# EAGLE board Lost-Tile-v1.0.0_v2 (EAGLE 9.7.0)
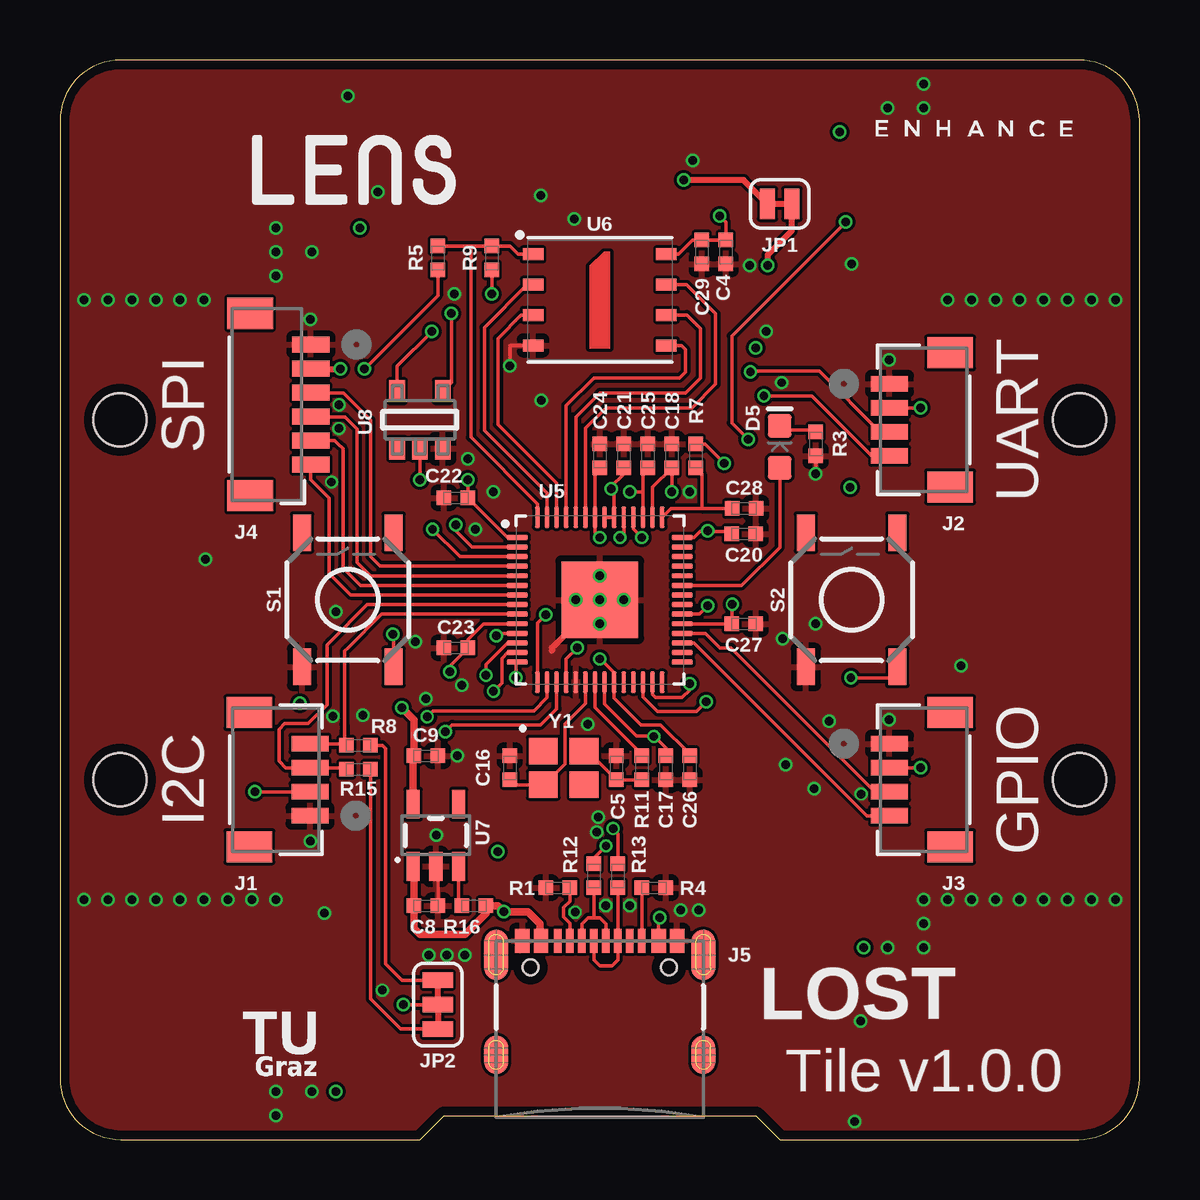
[diagram p0: board, top side]
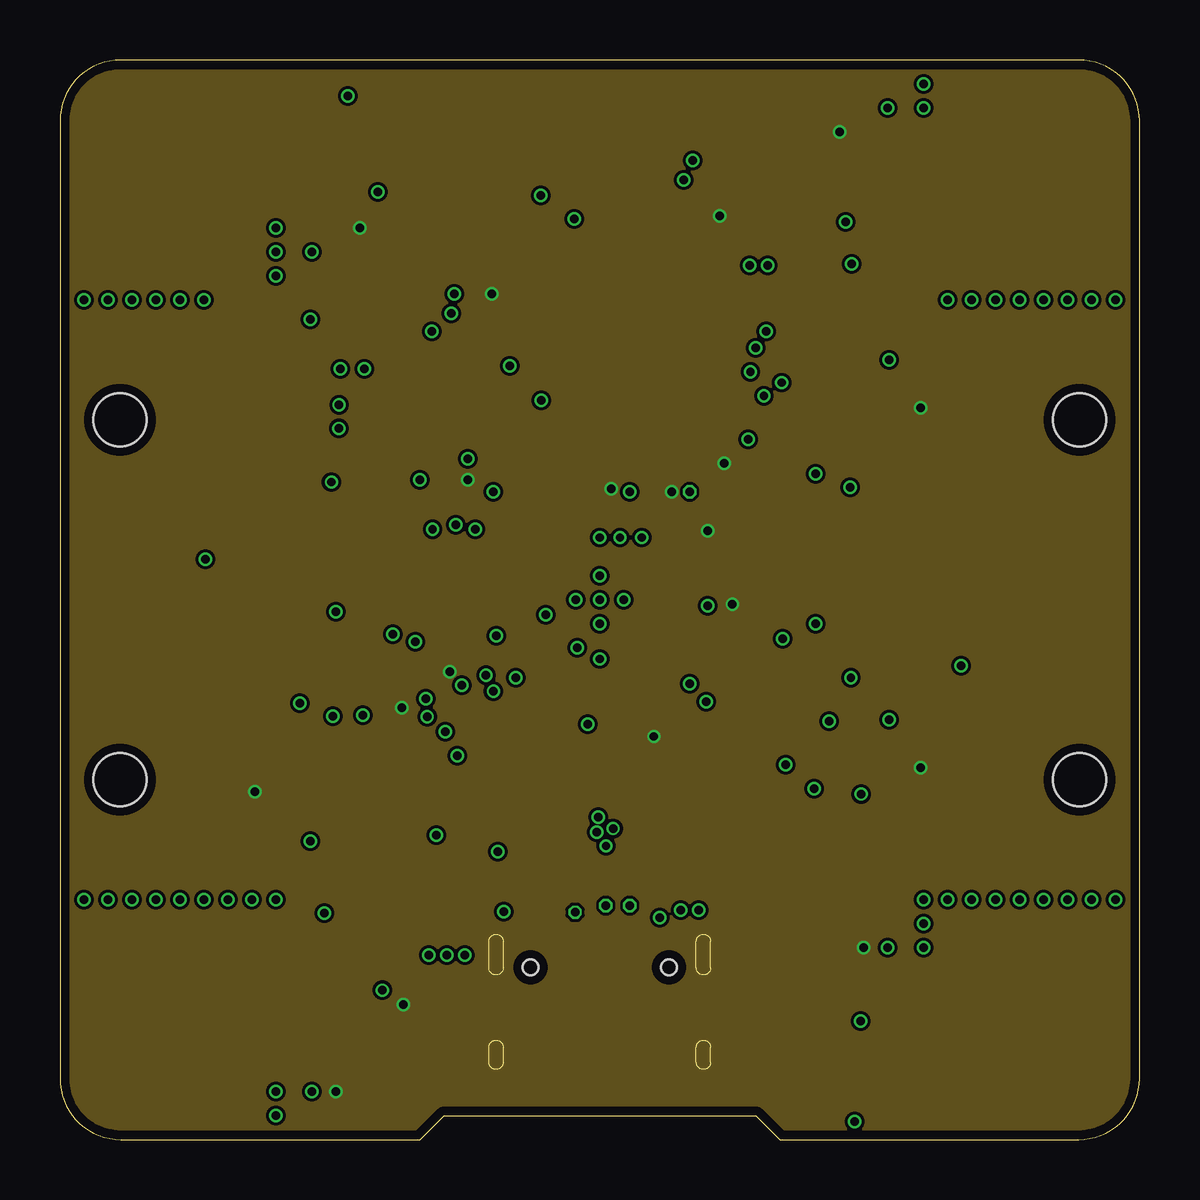
[diagram p1: board, inner layer Route2]
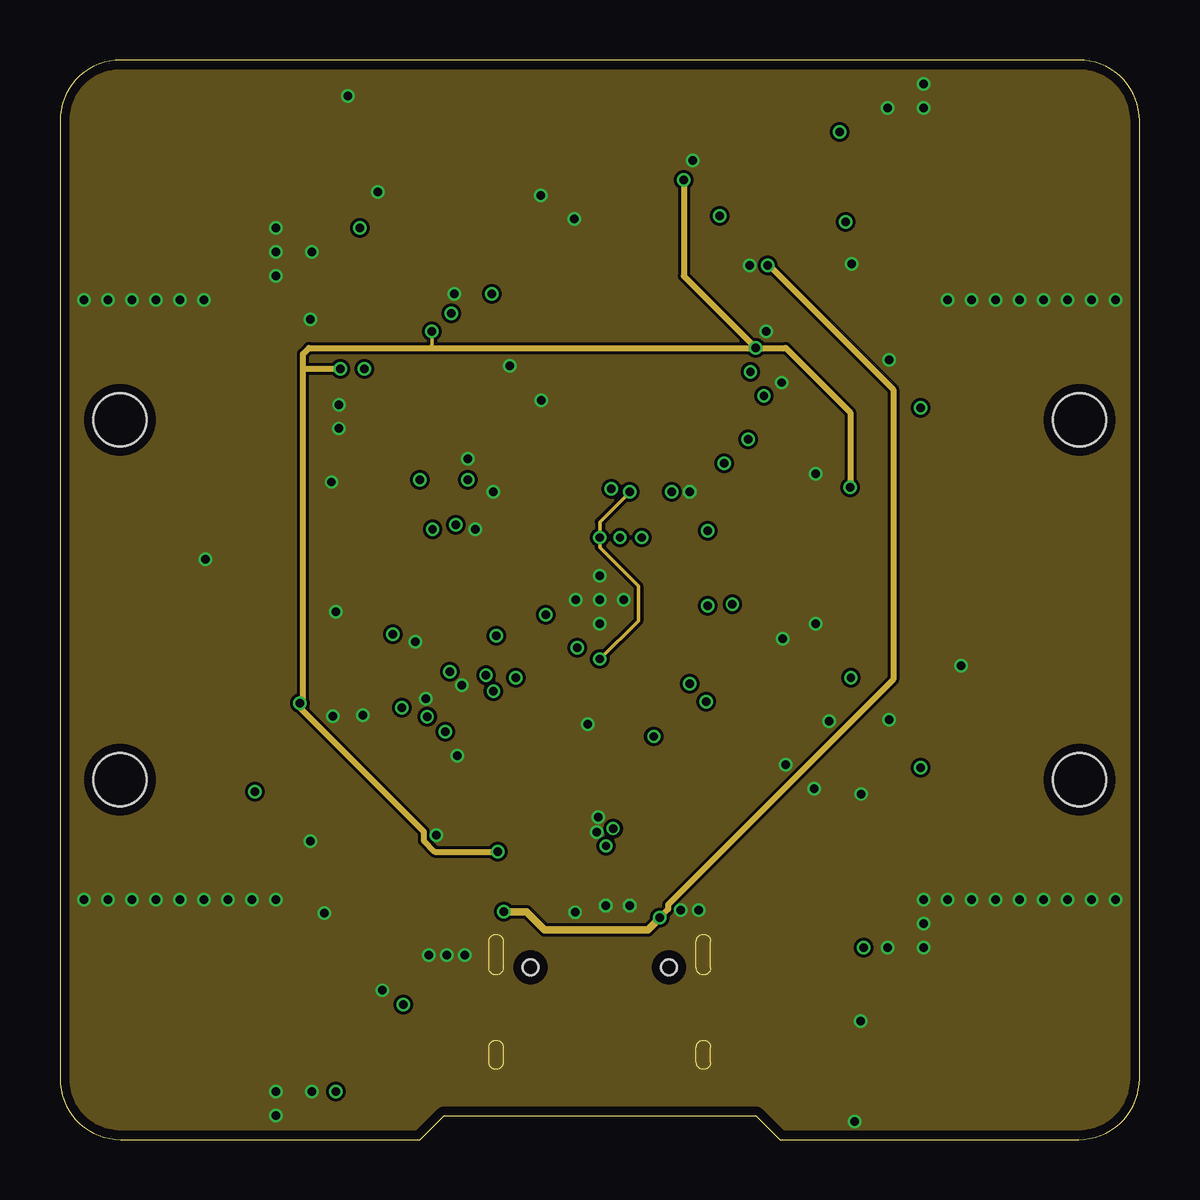
[diagram p2: board, inner layer Route15]
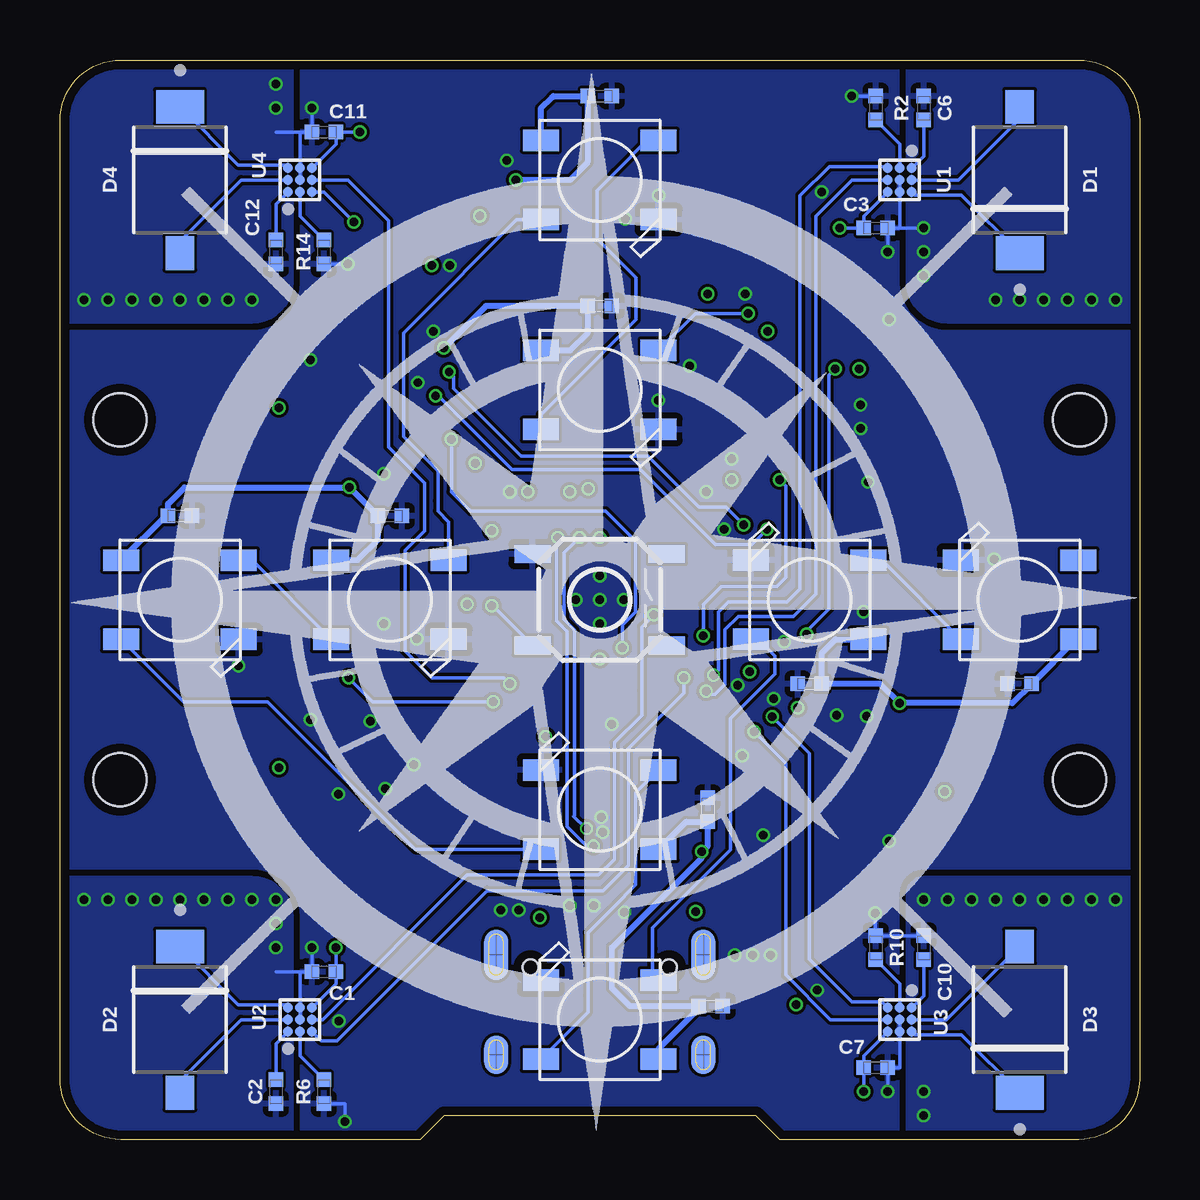
[diagram p3: board, bottom side, seen from below]

Size 45 x 45 mm. Coordinates in mm from the lower left corner, seen from the top.
Outline: 0,42.46 0,2.54 arc90 2.54,0 15,0 16,1 29,1 30,0 42.46,0 arc90 45,2.54 45,42.46 arc90 42.46,45 2.54,45 arc90 0,42.46
Copper layers (1*2*15*16): Top 0.035559375mm / dielectric 0.17018125mm / Route2 0.01778125mm / dielectric 47mil / Route15 0.01778125mm / dielectric 0.17018125mm / Bottom 0.035559375mm
Design rules "oshpark-4layer *": minimum track width 5mil, minimum drill 10mil, track to track 5mil, track to pad 5mil, pad to pad 5mil, via to via 5mil, smd to smd 5mil, copper to edge 15mil, drill to drill 6mil, minimum pad ring 4mil, minimum via ring 4mil, stop-mask expansion 1.5mil, vias tented up to drill 32mm, thermal gap 10mil
Net classes: 2 Clock: width 0.089 mm, clearance 0.178 mm
Holes 2.2 mm at 42.5,30 42.5,15 2.5,30 2.5,15

## Footprints (pad centres in the part's own frame; a part is rotated, then mirrored left to right if it is on the bottom)
0402-TIGHT = smd 0.6 x 0.6: 1 -0.5,0; 2 0.5,0
OSRAM_OPTO_SEMICONDUCTORS_INC._BPW_34_S-Z_0 = smd 1.4 x 2: 1 3.05,0 | smd 1.4 x 1.2: 2 -3.05,0
LED-0603 = smd 1 x 1: A -0.877,0; C 0.877,0
CONN_BM04B-SRSS-TBT_(LF)(SN)_J = smd 0.66 x 1.549: 1 -1.5,-1.422; 2 -0.5,-1.422; 3 0.5,-1.422; 4 1.5,-1.422 | smd 1.295 x 1.905: 5 -2.8,1.103; 6 2.8,1.103
CONN_BM06B-SRSS-TB_JST = smd 0.66 x 1.549: 1 -2.5,1.83; 2 -1.5,1.83; 3 -0.5,1.83; 4 0.5,1.83; 5 1.5,1.83; 6 2.5,1.83 | smd 1.295 x 1.905: 7 -3.8,-0.695; 8 3.8,-0.695
USB-C-16P-4LAYER-ISOLATED = smd 0.3 x 1: A5 -1.25,-0.34; A6 -0.25,-0.34; A7 0.25,-0.34; A8 1.25,-0.34; B5 1.75,-0.34; B6 0.75,-0.34; B7 -0.75,-0.34; B8 -1.75,-0.34 | smd 0.6 x 1: GND -3.225,-0.34; GND2 3.225,-0.34; VBUS1 -2.45,-0.34; VBUS2 2.45,-0.34 | smd 1 x 2.1: SHLD1 -4.32,-0.915; SHLD2 4.32,-0.915 | smd 1 x 2.1 bottom: SHLD3 -4.32,-0.915; SHLD4 4.32,-0.915 | smd 1 x 1.6: SHLD5 -4.32,-5.095; SHLD8 4.32,-5.095 | smd 1 x 1.6 bottom: SHLD6 -4.32,-5.095; SHLD7 4.32,-5.095 | hole 0.65: -2.89,-1.445; 2.89,-1.445
SMT-JUMPER_2_NC_TRACE_SILK = smd 0.635 x 1.27: 1 -0.508,0; 2 0.508,0
SMT-JUMPER_3_2-NC_TRACE_SILK = smd 0.635 x 1.27: 1 -1.016,0; 2 0,0; 3 1.016,0
WS2812B = smd 1.5 x 0.9: 1-VDD 2.45,-1.65; 2-DOUT 2.45,1.65; 3-GND -2.45,1.65; 4-DIN -2.45,-1.65
TACTILE_SWITCH_SMD_5.2MM = smd 1.524 x 0.762: 1 -2.794,1.905; 2 2.794,1.905; 3 -2.794,-1.905; 4 2.794,-1.905
TRIAD_SEMI_TS4231_0 = smd 0.419 x 0.419: A1 -0.5,0.5; A2 0,0.5; A3 0.5,0.5; B1 -0.5,0; B2 0,0; B3 0.5,0; C1 -0.5,-0.5; C2 0,-0.5; C3 0.5,-0.5
QFN-56 = smd 0.875 x 0.2: 1 -3.437,2.6; 2 -3.437,2.2; 3 -3.437,1.8; 4 -3.437,1.4; 5 -3.437,1; 6 -3.437,0.6; 7 -3.437,0.2; 8 -3.437,-0.2; 9 -3.437,-0.6; 10 -3.437,-1; 11 -3.437,-1.4; 12 -3.437,-1.8; 13 -3.437,-2.2; 14 -3.437,-2.6; 29 3.437,-2.6; 30 3.437,-2.2; 31 3.437,-1.8; 32 3.437,-1.4; 33 3.437,-1; 34 3.437,-0.6; 35 3.437,-0.2; 36 3.437,0.2; 37 3.437,0.6; 38 3.437,1; 39 3.437,1.4; 40 3.437,1.8; 41 3.437,2.2; 42 3.437,2.6 | smd 0.2 x 0.875: 15 -2.6,-3.437; 16 -2.2,-3.437; 17 -1.8,-3.437; 18 -1.4,-3.437; 19 -1,-3.437; 20 -0.6,-3.437; 21 -0.2,-3.437; 22 0.2,-3.437; 23 0.6,-3.437; 24 1,-3.437; 25 1.4,-3.437; 26 1.8,-3.437; 27 2.2,-3.437; 28 2.6,-3.437; 43 2.6,3.437; 44 2.2,3.437; 45 1.8,3.437; 46 1.4,3.437; 47 1,3.437; 48 0.6,3.437; 49 0.2,3.437; 50 -0.2,3.437; 51 -0.6,3.437; 52 -1,3.437; 53 -1.4,3.437; 54 -1.8,3.437; 55 -2.2,3.437; 56 -2.6,3.437 | smd 3.2 x 3.2: EPAD 0,0
WSON-8-6X5-SKINNY_CENTERPAD = smd 0.85 x 0.5: 1 -2.775,1.905; 2 -2.775,0.635; 3 -2.775,-0.635; 4 -2.775,-1.905; 5 2.775,-1.905; 6 2.775,-0.635; 7 2.775,0.635; 8 2.775,1.905
SOT23-5 = smd 0.55 x 1.2: 1 -0.95,-1.3; 2 0,-1.3; 3 0.95,-1.3; 4 0.95,1.3; 5 -0.95,1.3
DBV0005A_L = smd 0.9 x 0.65: 1 -1.2,0.95; 2 -1.2,0; 3 -1.2,-0.95; 4 1.2,-0.95; 5 1.2,0.95
CRYSTAL-SMD-2X2.5MM = smd 1.2 x 1.1: P1 0.846,0.69; P2 -0.854,0.69; P3 -0.854,-0.71; P4 0.846,-0.71

## Placement (x,y rotation side)
C1  0.1uF  [0402-TIGHT]  34,7 180 bottom
C2  1.0uF  [0402-TIGHT]  36,2 270 bottom
C3  0.1uF  [0402-TIGHT]  11,38 0 bottom
C4  2.2uF  [0402-TIGHT]  27.75,37 270 top
C5  15pF  [0402-TIGHT]  23.19,15.5 270 top
C6  1.0uF  [0402-TIGHT]  9,43 90 bottom
C7  0.1uF  [0402-TIGHT]  11,3 0 bottom
C8  1.0uF  [0402-TIGHT]  15.25,9.75 0 top
C9  2.2uF  [0402-TIGHT]  15.25,16 0 top
C10  1.0uF  [0402-TIGHT]  9,8 90 bottom
C11  0.1uF  [0402-TIGHT]  34,42 180 bottom
C12  1.0uF  [0402-TIGHT]  36,37 270 bottom
C13  0.1uF  [0402-TIGHT]  5,19 180 bottom
C14  0.1uF  [0402-TIGHT]  13.75,19 180 bottom
C15  0.1uF  [0402-TIGHT]  22.5,43.5 0 bottom
C16  15pF  [0402-TIGHT]  18.75,15.5 270 top
C17  0.1uF  [0402-TIGHT]  25.25,15.5 270 top
C18  0.1uF  [0402-TIGHT]  25.5,28.5 90 top
C19  0.1uF  [0402-TIGHT]  22.5,34.75 0 bottom
C20  0.1uF  [0402-TIGHT]  28.5,25.25 0 top
C21  0.1uF  [0402-TIGHT]  23.5,28.5 90 top
C22  0.1uF  [0402-TIGHT]  16.5,26.75 180 top
C23  0.1uF  [0402-TIGHT]  16.5,20.5 180 top
C24  0.1uF  [0402-TIGHT]  22.5,28.5 90 top
C25  0.1uF  [0402-TIGHT]  24.5,28.5 90 top
C26  2.2uF  [0402-TIGHT]  26.25,15.5 270 top
C27  2.2uF  [0402-TIGHT]  28.5,21.5 0 top
C28  2.2uF  [0402-TIGHT]  28.52,26.31 0 top
C29  0.1uF  [0402-TIGHT]  26.75,37 270 top
C30  0.1uF  [0402-TIGHT]  40,26 0 bottom
C31  0.1uF  [0402-TIGHT]  31.25,26 0 bottom
C32  0.1uF  [0402-TIGHT]  17.88,5.56 0 bottom
C33  0.1uF  [0402-TIGHT]  18,13.75 90 bottom
D1  OSRAM_OPTO_SEMICONDUCTORS_INC._BPW_34_S-ZOSRAM_OPTO_SEMICONDUCTORS_INC._BPW_34_S-Z_0_0  [OSRAM_OPTO_SEMICONDUCTORS_INC._BPW_34_S-Z_0]  5,40 270 bottom
D2  OSRAM_OPTO_SEMICONDUCTORS_INC._BPW_34_S-ZOSRAM_OPTO_SEMICONDUCTORS_INC._BPW_34_S-Z_0_0  [OSRAM_OPTO_SEMICONDUCTORS_INC._BPW_34_S-Z_0]  40,5 90 bottom
D3  OSRAM_OPTO_SEMICONDUCTORS_INC._BPW_34_S-ZOSRAM_OPTO_SEMICONDUCTORS_INC._BPW_34_S-Z_0_0  [OSRAM_OPTO_SEMICONDUCTORS_INC._BPW_34_S-Z_0]  5,5 270 bottom
D4  OSRAM_OPTO_SEMICONDUCTORS_INC._BPW_34_S-ZOSRAM_OPTO_SEMICONDUCTORS_INC._BPW_34_S-Z_0_0  [OSRAM_OPTO_SEMICONDUCTORS_INC._BPW_34_S-Z_0]  40,40 90 bottom
D5  BLUE  [LED-0603]  30,28.88 90 top
J1  BM04B-SRSS-TBT_(LF)(SN)CONN_BM04B-SRSS-TBT_(LF)(SN)_J  [CONN_BM04B-SRSS-TBT_(LF)(SN)_J]  9,15 90 top
J2  BM04B-SRSS-TBT_(LF)(SN)CONN_BM04B-SRSS-TBT_(LF)(SN)_J  [CONN_BM04B-SRSS-TBT_(LF)(SN)_J]  36,30 270 top
J3  BM04B-SRSS-TBT_(LF)(SN)CONN_BM04B-SRSS-TBT_(LF)(SN)_J  [CONN_BM04B-SRSS-TBT_(LF)(SN)_J]  36,15 270 top
J4  BM06B-SRSS-TB(LF)(SN)CONN_BM06B-SRSS-TB_JST  [CONN_BM06B-SRSS-TB_JST]  8.62,30.64 270 top
J5  USB Female Type C Connector  [USB-C-16P-4LAYER-ISOLATED]  22.5,8.62 0 top
JP1  JUMPER-SMT_2_NC_TRACE_SILK  [SMT-JUMPER_2_NC_TRACE_SILK]  30,39 180 top
JP2  JUMPER-SMT_3_2-NC_TRACE_SILK  [SMT-JUMPER_3_2-NC_TRACE_SILK]  15.75,5.62 90 top
LED1  WS2812B5050  [WS2812B]  22.5,31.25 180 bottom
LED2  WS2812B5050  [WS2812B]  22.5,40 180 bottom
LED3  WS2812B5050  [WS2812B]  31.25,22.5 180 bottom
LED4  WS2812B5050  [WS2812B]  40,22.5 180 bottom
LED5  WS2812B5050  [WS2812B]  22.5,13.75 0 bottom
LED6  WS2812B5050  [WS2812B]  22.5,5 0 bottom
LED7  WS2812B5050  [WS2812B]  13.75,22.5 0 bottom
LED8  WS2812B5050  [WS2812B]  5,22.5 0 bottom
LG1  TU-LOGOSMALL-BICOL  [TU-LOGO-SMALL-BICOL]  5.62,4.25 0 top
LG2  EUWBBICOL  [EUWB_LOGO-BICOL]  33.56,38.31 0 top
LG3  LENS  [LENS]  2,38 0 top
LG4  LOST_LOGO  [LOST_LOGO]  44.59,-0.09 0 bottom
R1  5.1k  [0402-TIGHT]  20.75,10.5 180 top
R2  15K  [0402-TIGHT]  11,43 270 bottom
R3  1k  [0402-TIGHT]  31.5,29 90 top
R4  5.1k  [0402-TIGHT]  24.75,10.5 0 top
R5  1k  [0402-TIGHT]  15.75,36.75 270 top
R6  15K  [0402-TIGHT]  34,2 90 bottom
R7  200OHM-0402T-1/16W-1%  [0402-TIGHT]  26.5,28.5 90 top
R8  4.7k  [0402-TIGHT]  12.44,16.44 0 top
R9  10k  [0402-TIGHT]  18,36.75 270 top
R10  15K  [0402-TIGHT]  11,8 270 bottom
R11  1k  [0402-TIGHT]  24.25,15.5 90 top
R12  27  [0402-TIGHT]  22.25,11 90 top
R13  27  [0402-TIGHT]  23.25,11 90 top
R14  15K  [0402-TIGHT]  34,37 90 bottom
R15  4.7k  [0402-TIGHT]  12.44,15.44 0 top
R16  10k  [0402-TIGHT]  17.25,9.75 0 top
S1  MOMENTARY-SWITCH-SPST-SMD-5.2MM-TALL  [TACTILE_SWITCH_SMD_5.2MM]  12,22.5 90 top
S2  MOMENTARY-SWITCH-SPST-SMD-5.2MM-TALL  [TACTILE_SWITCH_SMD_5.2MM]  33,22.5 90 top
S3  MOMENTARY-SWITCH-SPST-SMD-5.2MM-TALL  [TACTILE_SWITCH_SMD_5.2MM]  22.5,22.5 0 bottom
U1  TRIAD_SEMI_TS4231TRIAD_SEMI_TS4231_0_0  [TRIAD_SEMI_TS4231_0]  10,40 270 bottom
U2  TRIAD_SEMI_TS4231TRIAD_SEMI_TS4231_0_0  [TRIAD_SEMI_TS4231_0]  35,5 90 bottom
U3  TRIAD_SEMI_TS4231TRIAD_SEMI_TS4231_0_0  [TRIAD_SEMI_TS4231_0]  10,5 270 bottom
U4  TRIAD_SEMI_TS4231TRIAD_SEMI_TS4231_0_0  [TRIAD_SEMI_TS4231_0]  35,40 90 bottom
U5  RP2040  [QFN-56]  22.5,22.5 0 top
U6  W25QXX128MBIT  [WSON-8-6X5-SKINNY_CENTERPAD]  22.5,35 0 top
U7  3.3V  [SOT23-5]  15.67,12.68 0 top
U8  SN74LV1T34DBVRG4DBV0005A_L  [DBV0005A_L]  15,30 90 top
Y1  12MHz  [CRYSTAL-SMD-2X2.5MM]  21,15.5 0 top

## Library data of the parts
C1 C3 C7 C11 C13-C15 C17-C25 C29-C33 = SparkFun-Capacitors; PROD_ID: CAP-14993
C2 C6 C8 C10 C12 = SparkFun-Capacitors; PROD_ID: CAP-12417
C4 C9 C26-C28 = SparkFun-Capacitors; PROD_ID: CAP-14232
C5 C16 = SparkFun-Capacitors; PROD_ID: CAP-13063
D1-D4 = OSRAM Opto Semiconductors Inc. - BPW 34 S-Z; CENTROID_NOT_SPECIFIED: No; DATASHEET: https://dammedia.osram.info/media/resource/hires/osram-dam-2495872/BPW%2034%20S.pdf; DIGIKEY_DESCRIPTION: DIODE PHOTODIODE SMT; DIGIKEY_PART_NUMBER: 475-2659-1-ND; LEAD_FREE: yes; MF: OSRAM Opto Semiconductors Inc.; MOUSER_PART_NUMBER: 720-BPW34S-Z; MPN: BPW 34 S-Z; PACKAGE: SMT_6MM45_3MM85; PREFIX: D; ROHS: yes; TEMPERATURE_RANGE_HIGH: +100°C; TEMPERATURE_RANGE_LOW: -40°C
D5 = SparkFun-LED; PROD_ID: DIO-08575
J1-J3 = 2024-01-04_12-28-16_Library; COPYRIGHT: Copyright (C) 2024 Ultra Librarian. All rights reserved.; MANUFACTURER_PART_NUMBER: BM04B-SRSS-TBT (LF)(SN); MFR_NAME: JST
J4 = 2024-01-04_12-26-39_Library; COPYRIGHT: Copyright (C) 2024 Ultra Librarian. All rights reserved.; MANUFACTURER_PART_NUMBER: BM06B-SRSS-TB(LF)(SN); MFR_NAME: JST
J5 = SparkFun-Connectors; PROD_ID: CONN-14122
JP1 JP2 = SparkFun-Jumpers
LED1-LED8 = adafruit
LG1 = tugraz
LG2 = euwb_logo
LG3 = lens_logo
LG4 = LOST_Logo
R1 R4 = SparkFun-Resistors; PROD_ID: RES-14340
R2 R6 R10 R14 = SparkFun-Resistors; PROD_ID: RES-15004
R3 R5 R11 = SparkFun-Resistors; PROD_ID: RES-14342
R7 = SparkFun-Resistors; PROD_ID: RES-15550
R8 R15 = SparkFun-Resistors; PROD_ID: RES-15343
R9 R16 = SparkFun-Resistors; PROD_ID: RES-14241
R12 R13 = SparkFun-Resistors; PROD_ID: RES-15238
S1-S3 = SparkFun-Switches; PROD_ID: SWCH-14139
U1-U4 = Triad Semi - TS4231; DATASHEET: https://www.triadsemi.com/wp-content/uploads/dlm_uploads/2017/06/triad_semi_ts4231_datasheet_rev_a.pdf; IPC_LAND_PATTERN_NAME: BGA9N50P3X3_166X166X55; MF: Triad Semi; MPN: TS4231; PACKAGE: WLSCP9; PREFIX: U; TEMPERATURE_HIGH: 150°C; TEMPERATURE_LOW: -40°C; VOLTAGE: 3V - 3.6V
U5 = parts; PROD_ID: IC-15502
U6 = SparkFun-IC-Memory; PROD_ID: IC-15107
U7 = SparkFun-IC-Power; PROD_ID: VREG-12457
U8 = 2024-01-08_16-33-13_Library; COPYRIGHT: Copyright (C) 2024 Ultra Librarian. All rights reserved.; MANUFACTURER_PART_NUMBER: SN74LV1T34DBVRG4; MFR_NAME: Texas Instruments; REFDES: RefDes; TYPE: TYPE
Y1 = SparkFun-Clocks; PROD_ID: XTAL-15540

## Nets
1.1V: C24.1 C25.1 C26.1 U5.23 U5.45 U5.50
3.3V: C1.1 C3.1 C4.1 C7.1 C9.1 C11.1 C17.1 C18.1 C20.1 C21.1 C22.1 C23.1 C27.1 C29.1 J1.2 J2.2 J3.2 JP2.2 R7.2 R9.2 U1.C3 U2.C3 U3.C3 U4.C3 U5.1 U5.10 U5.22 U5.33 U5.42 U5.44 U5.48 U5.49 U6.8 U7.5
!RESET!: S2.3 U5.26
+5V: C13.1 C14.1 C15.1 C19.1 C30.1 C31.1 C32.1 C33.1 J4.2 JP1.2 LED1.1-VDD LED2.1-VDD LED3.1-VDD LED4.1-VDD LED5.1-VDD LED6.1-VDD LED7.1-VDD LED8.1-VDD U8.5
ADC0: U5.38
ADC1: U5.39
ADC2: U5.40
ADC3: U5.41
AVDD: C28.1 R7.1 U5.43
BATT_ALERT: U5.36
BOOT: R5.2 S1.3
D1_OUT: U1.C1 U5.12
D2_OUT: U2.C1 U5.14
D3_OUT: U3.C1 U5.16
D4_OUT: U4.C1 U5.18
E1_OUT: U1.C2 U5.13
E2_OUT: U2.C2 U5.15
E3_OUT: U3.C2 U5.17
E4_OUT: U4.C2 U5.27
EN: R16.1 U7.3
GND: C1.2 C2.2 C3.2 C4.2 C5.1 C6.2 C7.2 C8.2 C9.2 C10.2 C11.2 C12.2 C13.2 C14.2 C15.2 C16.1 C17.2 C18.2 C19.2 C20.2 C21.2 C22.2 C23.2 C24.2 C25.2 C26.2 C27.2 C28.2 C29.2 C30.2 C31.2 C32.2 C33.2 J1.1 J2.1 J3.1 J4.1 J5.GND J5.GND2 LED1.3-GND LED2.3-GND LED3.3-GND LED4.3-GND LED5.3-GND LED6.3-GND LED7.3-GND LED8.3-GND R1.2 R2.1 R3.1 R4.2 R6.1 R10.1 R14.1 S1.1 S2.1 S3.1 U1.B2 U1.B3 U2.B2 U2.B3 U3.B2 U3.B3 U4.B2 U4.B3 U5.19 U5.EPAD U6.4 U7.2 U8.3
GPIO17: U5.28
GPIO18: U5.29
GPIO19: U5.30
GPIO20: J3.4 U5.31
GPIO21: J3.3 U5.32
GPIO22: S3.3 U5.34
I2C1_SCL: J1.4 R8.1 U5.9
I2C1_SCL/GPIO23: U5.35
I2C1_SDA: J1.3 R15.1 U5.8
IIN1+: D1.2 U1.A2
IIN1-: D1.1 U1.A3
IIN2+: D2.2 U2.A2
IIN2-: D2.1 U2.A3
IIN3+: D3.2 U3.A2
IIN3-: D3.1 U3.A3
IIN4+: D4.2 U4.A2
IIN4-: D4.1 U4.A3
LED_BUILTIN: D5.A U5.37
N$1: D5.C R3.2
N$2: LED1.2-DOUT LED2.4-DIN
N$3: LED2.2-DOUT LED3.4-DIN
N$4: R11.2 U5.21
N$5: C16.2 U5.20 Y1.P3
N$6: C5.2 R11.1 Y1.P1
N$7: LED6.2-DOUT LED7.4-DIN
N$8: C6.1 U1.A1
N$9: LED3.2-DOUT LED4.4-DIN
N$10: LED7.2-DOUT LED8.4-DIN
N$11: J5.A5 R1.1
N$12: J5.B5 R4.1
N$13: LED4.2-DOUT LED5.4-DIN
N$14: LED5.2-DOUT LED6.4-DIN
N$15: C10.1 U3.A1
N$16: C2.1 U2.A1
N$17: C12.1 U4.A1
N$18: JP2.3 R8.2
N$19: JP2.1 R15.2
QSPI-0: U5.53 U6.5
QSPI-1: U5.55 U6.2
QSPI-2: U5.54 U6.3
QSPI-3: U5.51 U6.7
QSPI-CLK [Clock]: U5.52 U6.6
QSPI-CS: R5.1 R9.1 U5.56 U6.1
RBIAS: R2.2 U1.B1
RBIAS1: R6.2 U2.B1
RBIAS2: R10.2 U3.B1
RBIAS3: R14.2 U4.B1
SPI0_CIPO: J4.5 U5.6
SPI0_COPI: J4.4 U5.5
SPI0_CSN: J4.6 U5.7
SPI0_SCK: J4.3 U5.4
SWDCK: U5.24
SWDIO: U5.25
UART0_RX: J2.4 U5.3
UART0_TX: J2.3 U5.2
USB_F_N: R12.2 U5.46
USB_F_P: R13.2 U5.47
USB_N: J5.A7 J5.B7 R12.1
USB_P: J5.A6 J5.B6 R13.1
V_USB: C8.1 J5.VBUS1 J5.VBUS2 JP1.1 R16.2 U7.1
WS2812_DI: U5.11 U8.2
WS2812_DI_HIGH: LED1.4-DIN U8.4

## Tracks (layer width: path | path; a pad name or v marks a point on that pad's centre or on a via)
1.1V  (via drill 0.35)
  Top 0.152: C24.1 22.3,27.8 U5.50 22.3,25.3 v22.5,25.09 | U5.45 24.3,27 | 24.3,27 24.3,27.8 C25.1 | v22.5,20.03 22.54,20.03 23.1,19.46 U5.23 23.1,18.41 24.23,17.28 25.03,17.28 26.25,16.07 C26.1 | 24.3,27 v23.75,27
  Route15 0.152: v23.75,27 22.5,25.75 v22.5,25.09 22.5,24.68 24.11,23.07 24.11,21.61 22.52,20.03 v22.5,20.03
3.3V  (via drill 0.35)
  Top 0.15: J2.2 v35.88,30.5 | J3.2 v35.88,15.5 | J1.2 v8.12,14.5
  Top 0.152: U6.8 25.77,36.91 26.37,37.5 C29.1 C4.1 27.75,38.25 v27.5,38.5 | v18,35.25 R9.2 | U5.1 18.65,25.1 C22.1 v17,27.5 | v16.25,19.5 16.25,19.75 C23.1 17,20.84 17.66,21.5 U5.10 | U5.22 22.7,18.16 24.04,16.82 24.76,16.82 | 24.76,16.82 25.25,16.32 C17.1 | U5.33 C27.1 28,22.28 v28.03,22.31 | 27,25.35 26.69,25.35 26.44,25.1 U5.42 | C20.1 27.9,25.35 27,25.35 | v27.69,28.19 26.88,29 R7.2 | U5.44 24.7,27.2 C18.1 v25.5,27 | U5.49 U5.48 23.1,27 v22.98,27.12 22.98,27.23 23.5,27.75 C21.1 | 27,25.35 v27,25.38 | 24.76,16.82 | v24.76,16.8 24.76,16.82 | v14.31,5.62 JP2.2
  Top 0.305: U7.5 14.72,15.97 C9.1 14.75,17.5 v14.25,18
  Bottom 0.152: U3.C3 11.5,3.5 C7.1 v11.5,2 | U2.C3 33.5,6.5 C1.1 v33.5,8 | U4.C3 33.5,41.5 C11.1 v32.5,42 | U1.C3 11.5,38.5 C3.1 v12.5,38
  pour Route2: -1.92,-1.92 46.92,-1.92 46.92,46.92 -1.92,46.92
!RESET!  (via drill 0.35)
  Top 0.152: U5.26 24.3,18.45 24.9,17.85 26.53,17.85 v26.94,18.25 | S2.3 34.91,19.25 v32.97,19.25
  Bottom 0.152: v26.94,18.25 29,18.25 31.97,18.25 v32.97,19.25
+5V  (via drill 0.35)
  Top 0.152: U8.5 14.05,32.24 v15.5,33.69
  Top 0.254: JP1.2 28.49,40 v26,40 | J4.2 10.47,32.12 v11.69,32.12
  Route15 0.152: v15.5,33.69 15.5,33.06 15.44,33
  Route15 0.254: v26,40 26,36 v29,33 | v32.94,27.19 32.94,30.31 30.25,33 v29,33 | 10.12,32.12 10.12,18.12 10,18 | 10.12,32.12 10.12,32.75 10.38,33 15.44,33 v29,33 | v10,18.19 10,18 | v11.69,32.12 10.12,32.12 | 10,18 15.16,12.84 15.16,12.47 15.62,12 v18.25,12
  Bottom 0.254: LED8.1-VDD 2.65,20.85 C13.1 5.31,18.19 v10,18.19 10.81,19 C14.1 13.25,20.27 12.68,20.85 LED7.1-VDD | v26,40 23.75,40 23,40.75 C15.1 24.44,43.5 24.5,43.44 24.95,42.99 LED2.1-VDD | v29,33 27.25,34.75 C19.1 23,33.62 23.73,32.9 LED1.1-VDD | LED4.1-VDD 40.6,26 C30.1 40.5,26.5 39.81,27.19 34.06,27.19 v32.94,27.19 C31.1 31.75,25 32.6,24.15 LED3.1-VDD | LED6.1-VDD 20.05,3.79 18.38,5.46 C32.1 21.25,5.56 22,6.31 22,8 18.25,11.75 v18.25,12 18,12.25 C33.1 18.9,13.25 LED5.1-VDD
AVDD
  Top 0.152: U5.43 25.47,26.31 26.5,26.31 26.75,26.31 | 26.75,26.31 27,26.31 C28.1 | R7.1 26.75,27.75 26.75,26.31
BOOT  (via drill 0.35)
  Top 0.152: R5.2 15.75,35.19 v12.69,32.12 | S1.3 13.9,21.03 v13.88,21.06
  Bottom 0.152: v12.69,32.12 12.94,31.87 12.94,22.12 13.88,21.19 v13.88,21.06
D1_OUT  (via drill 0.35)
  Top 0.152: U5.12 18.66,20.7 17.76,19.8 v17.76,19.35
  Bottom 0.152: U1.C1 10.56,40.56 12.94,40.56 14.15,39.35 14.15,22.95 14.7,22.4 17.13,22.4 17.56,21.98 17.56,19.55 v17.76,19.35
D2_OUT  (via drill 0.35)
  Top 0.152: v19,19.25 19,19.84 U5.14
  Bottom 0.152: U2.C1 34.12,4.12 33.45,4.12 27.2,10.38 23.5,10.38 22.38,10.38 21.31,11.44 21.31,16.31 19,18.62 v19,19.25
D3_OUT  (via drill 0.35)
  Top 0.152: U5.16 20.3,18.43 19.75,17.88 15.56,17.88 v15.31,17.62
  Bottom 0.152: U3.C1 10.75,5.75 12,5.75 13.77,7.52 13.77,16.09 v15.31,17.62
D4_OUT  (via drill 0.35)
  Top 0.152: v28.69,29.19 28,29.88 28,33.5 v32.75,38.25 | U5.18 21.1,20.03 v21.56,20.5
  Bottom 0.152: U4.C1 34,39.5 v32.75,38.25 | v28.69,29.19 28.69,27 27.88,26.19 22.25,26.19 21.02,24.96 21.02,21.99 21.56,21.45 v21.56,20.5
E1_OUT  (via drill 0.35)
  Top 0.152: U5.13 18.66,20.3 18.42,20.06 18.42,19.04 v18.07,18.69
  Bottom 0.152: U1.C2 12,40 13.5,38.5 13.5,22.75 14.44,21.81 16.73,21.81 17.28,21.26 17.28,18.97 17.69,18.56 17.94,18.56 v18.07,18.69
E2_OUT  (via drill 0.35)
  Top 0.152: U5.15 19.9,21.52 v20.25,21.88
  Bottom 0.152: v20.25,21.88 20.75,21.38 20.75,20 20.75,18.74 20.75,17.69 21.89,16.54 21.89,11.68 22.54,11.03 28.02,11.03 34.05,5 U2.C2
E3_OUT  (via drill 0.35)
  Top 0.152: U5.17 20.7,17.95 20.03,17.28 16.35,17.28 v16.06,17
  Bottom 0.152: v16.06,17 14.75,15.69 14.75,6.86 12.89,5 U3.C2
E4_OUT  (via drill 0.35)
  Top 0.152: U5.27 24.7,18.55 24.83,18.42 25.92,18.42 26.25,18.75 v26.25,19
  Bottom 0.152: v26.25,19 26.5,19.25 29.5,19.25 30.62,20.38 30.62,24.56 29.81,25.38 29.81,27.38 31.31,28.88 31.31,38.31 33,40 U4.C2
EN
  Top 0.152: 16.62,9.88 R16.1 16.62,9.88 | 16.62,9.88 U7.3
GND  (via drill 0.35)
  Top 0.15: J4.1 10.44,33.12
  Top 0.152: U6.4 18.75,33.09 v18.75,32.25 | R3.1 v31.5,27.75 | U7.2 15.76,11.29 C8.2
  Top 0.254: U5.EPAD 20.5,20.5 20.5,20.38
  Bottom 0.152: U3.B2 U3.B3 10,3 C7.2 v10.5,2 | U2.B2 U2.B3 35,7 C1.2 | C11.2 35,42 U4.B3 U4.B2 | C3.2 10,38 10,39 U1.B3 U1.B2 | v9,38 C3.2 | C11.2 36,42 | C1.2 36,7 | R6.1 33.12,1.5 v33.12,0.75 | C10.2 R10.1 11.02,8.52 v11.02,9.44 | R2.1 v12,43.5 | R14.1 v33,36.5 | C11.2 v34.5,43 | C3.2 v10.5,37 | C1.2 v34.5,8
  other vias: 22.75,9.75 23.75,9.75 26.25,27 13.25,39.5 33.38,4.94 22.5,22.5 22.5,23.5 22.5,21.5 21.5,22.5 22,17.31 23.5,22.5 11.38,17.65 30.08,31.55 33.4,14.4 11.63,29.64 11.32,27.4 11.63,30.63 16.56,16 22.44,13.44 22.38,12.81 16.75,18.94 18.06,27 20.06,30.81 21.44,38.38 6.06,24.19 31.44,14.62 30.25,15.62 32.06,17.44 37.56,19.75 30.12,20.88 29.44,33.69 28.75,36.44 34.56,17.5 34.56,32.5 10.44,34.19 10.44,12.44 20.04,39.36 17,28.38 15.25,18.37 17.31,25.44 1,35 1,10 44,10 44,35 2,35 3,35 4,35 5,35 2,10 3,10 4,10 5,10 43,10 42,10 41,10 40,10 43,35 42,35 41,35 40,35 9,1 9,2 36,8 36,9 36,44 36,43 9,36 9,37 36,10 39,10 38,10 39,35 38,35 37,35 37,10 6,35 6,10 7,10 8,10 9,10 13.43,6.22 21.47,9.47 14.81,20.75 12.62,17.69 16.88,7.69 16.12,7.69 15.38,7.69 25.88,9.56 26.62,9.56 15.69,12.69 31.5,21.5 11.5,22 16.44,35.25 26.38,40.81
  pour Bottom: 223 corners
  pour Bottom: -0.92,34.08 8,34.08 8.26,34.1 8.52,34.16 8.76,34.26 8.98,34.4 9.18,34.57 9.35,34.77 9.49,34.99 9.59,35.23 9.65,35.49 9.67,35.75 9.67,45.92 -0.92,45.92
  pour Bottom: 37,34.08 45.92,34.08 45.92,45.92 35.33,45.92 35.33,35.75 35.35,35.49 35.41,35.23 35.51,34.99 35.65,34.77 35.82,34.57 36.02,34.4 36.24,34.26 36.48,34.16 36.74,34.1
  pour Bottom: 35.33,-0.92 45.92,-0.92 45.92,10.92 37,10.92 36.74,10.9 36.48,10.84 36.24,10.74 36.02,10.6 35.82,10.43 35.65,10.23 35.51,10.01 35.41,9.77 35.35,9.51 35.33,9.25
  pour Bottom: -0.92,-0.92 9.67,-0.92 9.67,10.25 9.66,10.38 9.62,10.51 9.56,10.62 9.48,10.73 9.37,10.81 9.26,10.87 9.13,10.91 9,10.92 -0.92,10.92
  pour Top: -1.92,-1.92 46.92,-1.92 46.92,46.92 -1.92,46.92
  pour Route15: -1.92,-1.92 46.92,-1.92 46.92,46.92 -1.92,46.92
GPIO20
  Top 0.15: J3.4 33.62,13.5 31.62,15.5
  Top 0.152: U5.31 26.43,20.7 31.62,15.5
GPIO21
  Top 0.15: J3.3 33.98,14.5 27.98,20.5
  Top 0.152: U5.32 26.9,21.1 27.5,20.5 27.98,20.5
GPIO22  (via drill 0.35)
  Top 0.152: v27,22.25 26.65,21.9 U5.34
  Bottom 0.152: S3.3 26.95,22.25 v27,22.25
I2C1_SCL
  Top 0.15: 12,20.5 11.86,20.36 11.86,17.31
  Top 0.152: U5.9 13.4,21.9 12,20.5 | 11.86,17.31 11.86,17.02 11.86,16.52 R8.1 11.88,16.5 J1.4
I2C1_SDA
  Top 0.15: 11.25,20.75 11.12,20.62 11.12,18.12 10.34,17.34 9.37,17.34 9.12,17.09 9.12,15.78 9.41,15.5 10.31,15.5 J1.3
  Top 0.152: 11.25,20.75 12.8,22.3 U5.8 | J1.3 11.88,15.5 R15.1
IIN1+
  Bottom 0.152: D1.2 5,42.55 7.55,40 U1.A2
IIN1-
  Bottom 0.152: U1.A3 9.38,39.38 7.42,39.38 D1.1
IIN2+
  Bottom 0.152: U2.A2 36,5 37.45,5 40,2.45 D2.2
IIN2-
  Bottom 0.152: U2.A3 35.62,5.62 37.58,5.62 D2.1
IIN3+
  Bottom 0.152: U3.A2 8.05,5 D3.2
IIN3-
  Bottom 0.152: U3.A3 9.38,4.38 7.42,4.38 D3.1
IIN4+
  Bottom 0.152: U4.A2 37.45,40 40,37.45 D4.2
IIN4-
  Bottom 0.152: U4.A3 35.62,40.62 37.58,40.62 D4.1
LED_BUILTIN
  Top 0.152: U5.37 28.41,23.1 30,24.69 D5.A
N$1
  Top 0.152: R3.2 31.44,29.56 30.19,29.56 D5.C
N$2
  Bottom 0.152: LED1.2-DOUT 24.95,30.23 21,34.17 21,35.94 22.62,37.56 22.62,39.56 21.88,40.31 20.54,41.65 LED2.4-DIN
N$3
  Bottom 0.152: LED3.4-DIN 28.8,25.75 29.25,26.2 29.25,26.62 29.25,27.88 29.5,28.12 30.69,29.31 30.69,33.62 30.38,33.94 25.96,38.35 LED2.2-DOUT
N$4
  Top 0.152: U5.21 22.3,18.01 24.25,16.06 R11.2
N$5
  Top 0.152: C16.2 18.96,14.79 Y1.P3 20.18,14.79 21.04,15.65 21.04,17.32 21.9,18.18 U5.20
N$6
  Top 0.152: Y1.P1 21.99,16.04 22.14,16.04 C5.2 R11.1
N$7
  Bottom 0.152: LED7.4-DIN 15.89,20.85 15.2,20.16 15.2,19.41 17.06,17.55 17.06,12.07 20.3,8.82 20.3,7.95 20.3,6.9 LED6.2-DOUT
N$8
  Bottom 0.152: U1.A1 9,41 C6.1
N$9
  Bottom 0.152: LED3.2-DOUT 37,24.15 LED4.4-DIN
N$10
  Bottom 0.152: LED8.4-DIN 10.75,24.15 LED7.2-DOUT
N$11
  Top 0.152: J5.A5 21.25,9.02 20.99,9.27 20.99,9.67 21.25,9.93 R1.1
N$12
  Top 0.152: R4.1 J5.B5
N$13
  Bottom 0.152: LED4.2-DOUT 39.85,18.25 36.35,18.25 30.2,12.1 LED5.4-DIN
N$14
  Bottom 0.152: LED6.4-DIN 23,5.3 23,6 23,8.62 21.94,9.69 21,10.62 21,14.45 LED5.2-DOUT
N$15
  Bottom 0.152: U3.A1 9,6 C10.1
N$16
  Bottom 0.152: U2.A1 36,4 C2.1
N$17
  Bottom 0.152: U4.A1 36,39 C12.1
N$18
  Top 0.152: R8.2 13.44,16.44 13.56,16.31 13.56,7.33 14.25,6.64 JP2.3
N$19
  Top 0.152: R15.2 12.95,15.42 12.95,14.52 12.95,5.86 13.41,5.41 13.44,5.38 14.2,4.61 JP2.1
QSPI-0
  Top 0.152: U6.5 25.91,33.09 26.06,32.94 26.06,32 25.81,31.75 22.25,31.75 21.1,30.6 U5.53
QSPI-1
  Top 0.152: U5.55 20.3,26.95 19.75,27.5 17.69,29.56 17.69,33.85 19.48,35.63 U6.2
QSPI-2
  Top 0.152: U5.54 20.7,27.36 18.25,29.81 18.25,33.39 19.23,34.37 U6.3
QSPI-3
  Top 0.152: U6.7 26.11,35.63 27.33,34.42 27.33,31.49 26.34,30.5 22.75,30.5 21.9,29.65 U5.51
QSPI-CLK
  Top 0.152: U6.6 26.14,34.37 26.69,33.81 26.69,31.75 26.06,31.12 24.28,31.12 22.5,31.12 21.5,30.12 U5.52
QSPI-CS
  Top 0.152: U6.1 19.09,36.91 18.75,37.25 R5.1 R9.1 17.12,37.25 17.12,29.27 19.9,26.5 U5.56
RBIAS
  Bottom 0.152: U1.B1 10,41.5 R2.2
RBIAS1
  Bottom 0.152: U2.B1 35,3.5 R6.2
RBIAS2
  Bottom 0.152: R10.2 10,6.5 U3.B1
RBIAS3
  Bottom 0.152: U4.B1 35,38.5 R14.2
SPI0_CIPO
  Top 0.15: 11.59,29 11.46,29.14 J4.5
  Top 0.152: U5.6 12.53,23.1 11.8,23.83 11.8,28.79 11.59,29
SPI0_COPI
  Top 0.15: 12.38,24.06 12.38,29.62 11.88,30.12 10.47,30.12 J4.4
  Top 0.152: U5.5 12.94,23.5 12.38,24.06
SPI0_CSN
  Top 0.152: U5.7 13,22.7 12.11,22.7 11.22,23.59 11.22,26.75 10.46,27.51 J4.6
SPI0_SCK
  Top 0.15: 12.94,30 11.81,31.12 10.47,31.12 J4.3
  Top 0.152: U5.4 14,23.9 13.35,23.9 12.94,24.31 12.94,30
UART0_RX  (via drill 0.35)
  Top 0.15: J2.4 33.83,28.5 31.33,31
  Top 0.152: U5.3 16.67,24.3 v15.53,25.44 | v29.34,31 31.33,31
  Bottom 0.152: v15.53,25.44 16.16,24.81 17.67,24.81 20.79,27.94 26.16,27.94 29.22,31 v29.34,31
UART0_TX  (via drill 0.35)
  Top 0.15: J2.3 34.19,29.5
  Top 0.152: U5.2 17.18,24.7 16.5,25.38 v16.5,25.62 | v28.78,32 28.82,32.03 31.65,32.03 34.19,29.5
  Bottom 0.152: v16.5,25.62 17.25,26.38 18.38,26.38 20.5,28.5 25.78,28.5 28.59,31.31 28.59,31.81 v28.78,32
USB_F_N  (via drill 0.35)
  Top 0.152: v24.25,25.09 23.9,25.45 U5.46 | R12.2 22.25,11.75 v22.75,12.25 v22.76,12.24
  Bottom 0.152: v24.25,25.09 24.31,25.03 24.31,21.61 23.88,21.17 23.88,13.06 23.06,12.25 v22.76,12.25 v22.76,12.24
USB_F_P  (via drill 0.35)
  Top 0.152: v23.34,25.09 23.5,25.25 U5.47 | R13.2 23.25,12.75 23.05,12.96 v23.05,12.96
  Bottom 0.152: v23.34,25.09 23.59,24.84 23.98,24.46 23.98,21.67 23.56,21.25 23.56,13.51 23.59,13.48 23.08,12.96 v23.05,12.96
USB_N
  Top 0.152: J5.B7 21.75,9 22,9.25 22.25,9.25 | J5.A7 22.75,9 22.5,9.25 22.25,9.25 | R12.1 22.25,9.25
USB_P
  Top 0.152: R13.1 J5.B6 23.25,7.5 23,7.25 22.5,7.25 22.25,7.5 J5.A6
V_USB  (via drill 0.35)
  Top 0.152: J5.VBUS2 24.95,9.2 v25,9.25
  Top 0.254: JP1.1 30.5,37.88 29.5,36.88 v29.5,36.44
  Top 0.305: U7.1 14.75,11.35 C8.1 14.75,8.81 15,8.56 16.06,8.56 16.88,8.56 17.75,9.44 R16.2 18.25,9.75 v18.5,9.5 19.5,9.5 20,9 20,8.33 J5.VBUS1
  Route15 0.254: v29.5,36.44 29.56,36.44 34.74,31.26 34.74,19.18 25.34,9.78 25.34,9.59 v25,9.25
  Route15 0.305: v25,9.25 24.5,8.75 20.19,8.75 19.44,9.5 v18.5,9.5
WS2812_DI  (via drill 0.35)
  Top 0.152: v18.19,21 18.29,21.1 U5.11 | U8.2 v15,27.5
  Bottom 0.152: v18.19,21 18.19,22.31 17.44,23.06 15.12,23.06 14.75,23.44 14.75,24.25 14.75,27.25 v15,27.5
WS2812_DI_HIGH  (via drill 0.35)
  Top 0.152: U8.4 16.31,31.56 v16.31,34.44
  Bottom 0.152: LED1.4-DIN 18.51,34.44 v16.31,34.44

## Text on the board
tNames: SPI | UART | I2C | GPIO | LOST | Tile v1.0.0